# Altium PCB ESP-LED-Pcb.PcbDoc
Units mil, origin at the board's own origin, x right, y up, seen from the top; angles counter-clockwise.
Board outline 1655 x 850 mil, 2 copper layers (Top Layer, Bottom Layer); 27 components, 24 nets, 128 pads, 17 vias.
Unrouted connection lines stored in the file: 3.
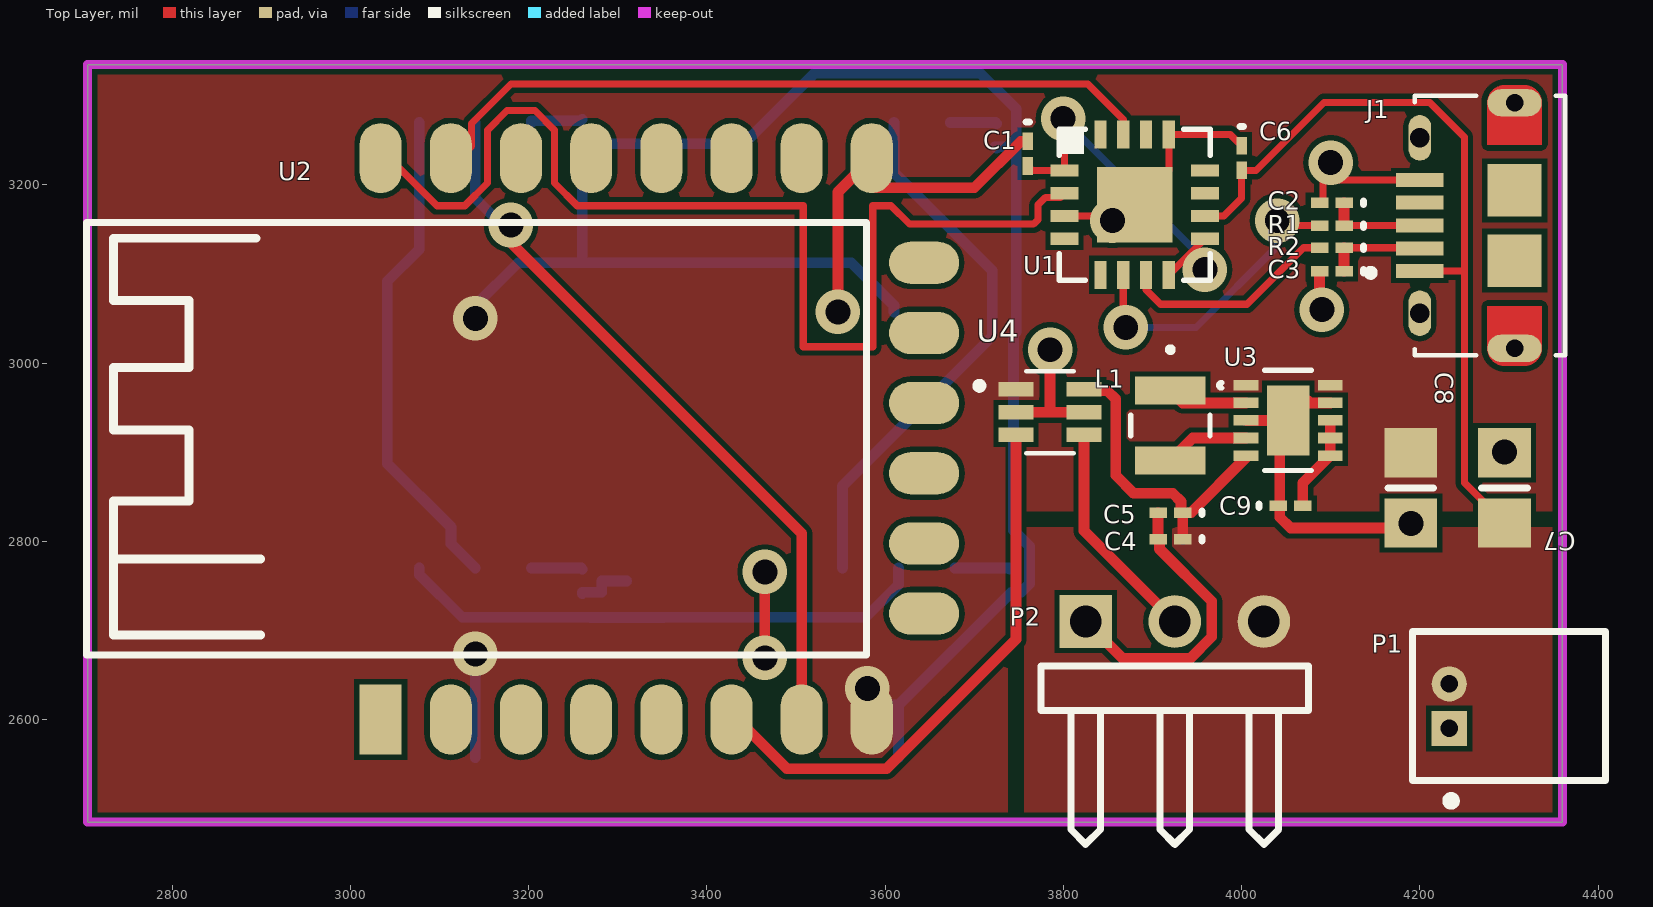
[diagram p0: Top Layer view]
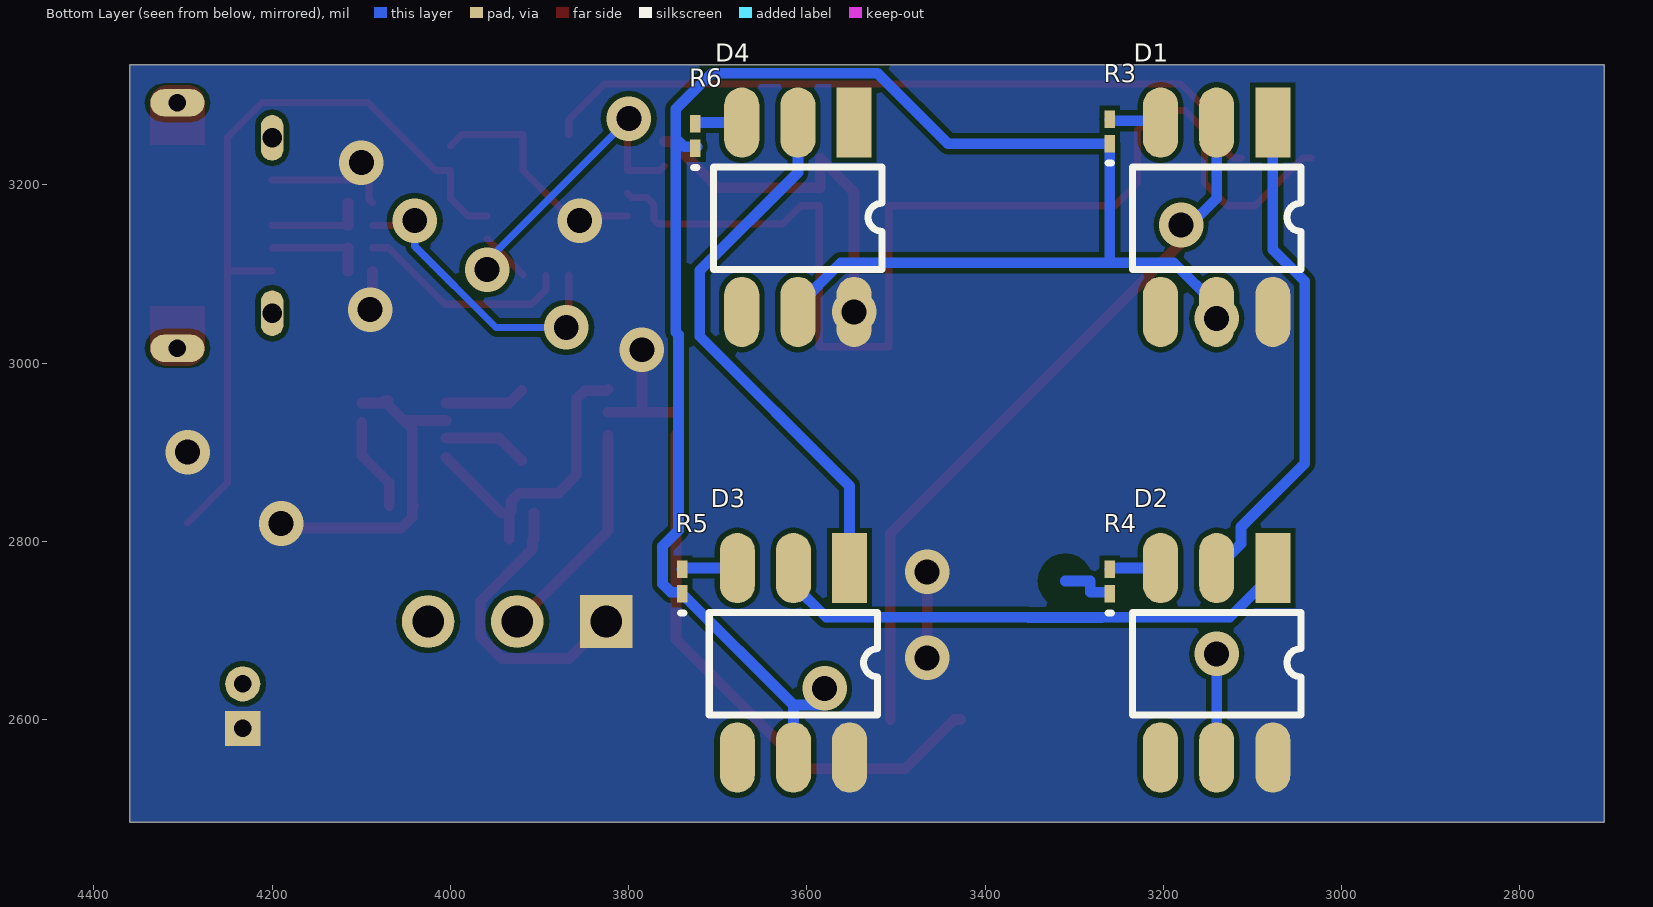
[diagram p1: Bottom Layer view, seen from below]

## Layer stack, top to bottom
Top Solder: solder mask 0.4, Solder Resist, Dk 3.5
Top Layer: signal copper 1.4
Dielectric 1: dielectric 12.6, FR-4, Dk 4.8
Bottom Layer: signal copper 1.4
Bottom Solder: solder mask 0.4, Solder Resist, Dk 3.5

## Board outline
2705,2485 2705,3335 4360,3335 4360,2485

## Design rules (kind name [scope] priority, off if disabled: settings)
Clearance [All] p1: gap=6 ignorepadtopadclearanceinfootprint=FALSE except(0: Arc-Hole Track-Hole SMDPad-Hole THPad-Hole Via-Hole Fill-Hole Poly-Hole Region-Hole Text-Hole)
PolygonConnect [All] p1: connectstyle=Direct reliefconductorwidth=10 reliefentries=4 polygonreliefangle="90 Angle" airgapwidth=10
RoutingVias [All] p1: holewidth=28 width=50 viastyle="Through Hole" minholewidth=28 minwidth=50 maxholewidth=28 maxwidth=50
SolderMaskExpansion [All] p1: expansion=4
Width [All] p1: maxlimit=30 minlimit=8 preferedwidth=12 minimp=50.000000 maximp=50.000000 favimp=50.000000
30 further rules are at their usual default settings.

## Components (designator, comment, footprint, x,y, rotation, side; value= is the part's Value field where it differs from the comment)
C1 "100nF" 0603 3760,3235 r270 top value=100pF
C2 "47nF" 0603 4101.22,3180 r180 top value=100pF
C3 "47nF" 0603 4101.22,3103.23 r180 top value=100pF
C4 "100nF" 0603 3920,2832.19 r180 top value=100pF
C5 "4.7uF" 0603 3920,2802.19 r180 top value=100pF
C6 "10uF" 0603 4000,3230 r270 top value=100pF
C7 "10uF" 6-0805_M 4295,2860 r270 top value=100pF
C8 "10uF" 6-0805_M 4190,2860 r90 top value=100pF
C9 "0.1uF" 0603 4055,2840 r0 top value=100pF
D1 "WS2812" WS2812 3077.01,3270 r270 bottom
D2 "WS2812" WS2812 3077.01,2770 r270 bottom
D3 "WS2812" WS2812 3552.01,2770 r270 bottom
D4 "WS2812" WS2812 3547.01,3270 r270 bottom
J1 "10118194-0001LF" *AMPHENOL_10118194-0001LF_10118194-0001LF(PRIMARY) 4306.3,3154.41 r90 top
L1 "1.5uH" DFE252012P-1R0M= 3920,2930 r270 top value=Value
P1 "Header 2" Molex_53048-0210_0 4300,2615 r90 top
P2 "Header 3H" HDR1X3H 3825,2710 r0 top
R1 "27R" 0603 4101.22,3154.41 r180 top value=1K
R2 "27R" 0603 4101.22,3129.41 r180 top value=1K
R3 "Res1" 0603 3260,3260 r90 bottom value=150
R4 "Res1" 0603 3260,2755 r90 bottom value=150
R5 "Res1" 0603 3740,2755 r90 bottom value=150
R6 "Res1" 0603 3725,3255 r90 bottom value=150
U1 "FT230XQ-R" *QFN16 3880,3177.81 r0 top
U2 "ESP12-F" ESP12-F 3033.78,2600.08 r90 top
U3 "Part Number: TPS63031DSKR" DSK10_2X1P2 4052.32,2935.63 r0 top value=Value
U4 "74LVC1T45GW,125" *SOT65P210X110-6N 3785,2945 r0 top

## Footprints (in the part's own frame and the unit in brackets; to place one, negate y for a bottom-side part, rotate by r counter-clockwise, add the part's x,y. Pads: shape width x height; smd on the part's side, far side on the other; paste and mask are expansions set on the pad)
6-0805_M [mm] "Chip Resistor, Body 2.0x1.2mm, IPC Low Density"
  rect 1.4x1.5 smd: 1(-1,0) 2(1,0)
  silkscreen extent 0,-0.65 0,0.65, body extent -1.07,-0.7 1.07,0.7, height 0.7
0603 [mm] "Chip Inductor, Body 0.6x0.3mm, IPC High Density"
  rect 0.5x0.3 smd: 1(-0.35,0) 2(0.35,0)
  silkscreen extent -0.9,-0.05 -0.9,0.05, body extent -0.33,-0.18 0.33,0.18, height 0.55
*AMPHENOL_10118194-0001LF_10118194-0001LF(PRIMARY) [mm]
  rect 0.4x1.35 smd: 1(-1.3,2.7) 2(-0.65,2.7) 3(0,2.7) 4(0.65,2.7) 5(1.3,2.7)
  oval 1.3x0.65 hole 0.55: S1(-2.5,2.7) S2(2.5,2.7)
  oval 0.775x1.55 hole 0.5: S3(-3.5,0) S6(3.5,0)
  rect 1.5x1.55 smd: S4(-1,0) S5(1,0)
  Top Layer region: -3.5,0.775 -3.5,0.575 -3.493,0.575 -3.48,0.574 -3.467,0.573 -3.454,0.571 -3.442,0.568 -3.429,0.565 -3.417,0.561 -3.404,0.556 -3.392,0.551 -3.381,0.545 -3.369,0.538 -3.358,0.531 -3.348,0.523 -3.338,0.515 -3.328,0.506 -3.319,0.497 -3.31,0.487 -3.302,0.477 -3.294,0.467 -3.287,0.456 -3.28,0.444 -3.274,0.433 -3.269,0.421 -3.264,0.408 -3.26,0.396 -3.257,0.383 -3.254,0.371 -3.252,0.358 -3.251,0.345 -3.25,0.332 -3.25,0.325 -3.25,-0.325 -3.25,-0.332 -3.251,-0.345 -3.252,-0.358 -3.254,-0.371 -3.257,-0.383 -3.26,-0.396 -3.264,-0.408 -3.269,-0.421 -3.274,-0.433 -3.28,-0.444 -3.287,-0.456 -3.294,-0.467 -3.302,-0.477 -3.31,-0.487 -3.319,-0.497 -3.328,-0.506 -3.338,-0.515 -3.348,-0.523 -3.358,-0.531 -3.369,-0.538 -3.381,-0.545 -3.392,-0.551 -3.404,-0.556 -3.417,-0.561 -3.429,-0.565 -3.442,-0.568 -3.454,-0.571 -3.467,-0.573 -3.48,-0.574 -3.493,-0.575 -3.5,-0.575 -3.5,-0.775 -2.3,-0.775 -2.3,0.775 -3.5,0.775
  Top Layer region: -3.5,0.775 -3.5,0.575 -3.507,0.575 -3.52,0.574 -3.533,0.573 -3.546,0.571 -3.558,0.568 -3.571,0.565 -3.583,0.561 -3.596,0.556 -3.608,0.551 -3.619,0.545 -3.631,0.538 -3.642,0.531 -3.652,0.523 -3.662,0.515 -3.672,0.506 -3.681,0.497 -3.69,0.487 -3.698,0.477 -3.706,0.467 -3.713,0.456 -3.72,0.444 -3.726,0.433 -3.731,0.421 -3.736,0.408 -3.74,0.396 -3.743,0.383 -3.746,0.371 -3.748,0.358 -3.749,0.345 -3.75,0.332 -3.75,0.325 -3.75,-0.325 -3.75,-0.332 -3.749,-0.345 -3.748,-0.358 -3.746,-0.371 -3.743,-0.383 -3.74,-0.396 -3.736,-0.408 -3.731,-0.421 -3.726,-0.433 -3.72,-0.444 -3.713,-0.456 -3.706,-0.467 -3.698,-0.477 -3.69,-0.487 -3.681,-0.497 -3.672,-0.506 -3.662,-0.515 -3.652,-0.523 -3.642,-0.531 -3.631,-0.538 -3.619,-0.545 -3.608,-0.551 -3.596,-0.556 -3.583,-0.561 -3.571,-0.565 -3.558,-0.568 -3.546,-0.571 -3.533,-0.573 -3.52,-0.574 -3.507,-0.575 -3.5,-0.575 -3.5,-0.775 -3.513,-0.775 -3.539,-0.774 -3.565,-0.771 -3.591,-0.767 -3.617,-0.761 -3.642,-0.755 -3.667,-0.746 -3.691,-0.737 -3.715,-0.726 -3.739,-0.715 -3.761,-0.701 -3.783,-0.687 -3.804,-0.672 -3.825,-0.655 -3.844,-0.638 -3.863,-0.619 -3.88,-0.6 -3.897,-0.579 -3.912,-0.558 -3.926,-0.536 -3.94,-0.514 -3.951,-0.49 -3.962,-0.466 -3.971,-0.442 -3.98,-0.417 -3.986,-0.392 -3.992,-0.366 -3.996,-0.34 -3.999,-0.314 -4,-0.288 -4,-0.275 -4,0.275 -4,0.288 -3.999,0.314 -3.996,0.34 -3.992,0.366 -3.986,0.392 -3.98,0.417 -3.971,0.442 -3.962,0.466 -3.951,0.49 -3.94,0.514 -3.926,0.536 -3.912,0.558 -3.897,0.579 -3.88,0.6 -3.863,0.619 -3.844,0.638 -3.825,0.655 -3.804,0.672 -3.783,0.687 -3.761,0.701 -3.739,0.715 -3.715,0.726 -3.691,0.737 -3.667,0.746 -3.642,0.755 -3.617,0.761 -3.591,0.767 -3.565,0.771 -3.539,0.774 -3.513,0.775 -3.5,0.775
  Top Layer region: 3.5,-0.775 3.5,-0.575 3.493,-0.575 3.48,-0.574 3.467,-0.573 3.454,-0.571 3.442,-0.568 3.429,-0.565 3.417,-0.561 3.404,-0.556 3.392,-0.551 3.381,-0.545 3.369,-0.538 3.358,-0.531 3.348,-0.523 3.338,-0.515 3.328,-0.506 3.319,-0.497 3.31,-0.487 3.302,-0.477 3.294,-0.467 3.287,-0.456 3.28,-0.444 3.274,-0.433 3.269,-0.421 3.264,-0.408 3.26,-0.396 3.257,-0.383 3.254,-0.371 3.252,-0.358 3.251,-0.345 3.25,-0.332 3.25,-0.325 3.25,0.325 3.25,0.332 3.251,0.345 3.252,0.358 3.254,0.371 3.257,0.383 3.26,0.396 3.264,0.408 3.269,0.421 3.274,0.433 3.28,0.444 3.287,0.456 3.294,0.467 3.302,0.477 3.31,0.487 3.319,0.497 3.328,0.506 3.338,0.515 3.348,0.523 3.358,0.531 3.369,0.538 3.381,0.545 3.392,0.551 3.404,0.556 3.417,0.561 3.429,0.565 3.442,0.568 3.454,0.571 3.467,0.573 3.48,0.574 3.493,0.575 3.5,0.575 3.5,0.775 2.3,0.775 2.3,-0.775 3.5,-0.775
  Top Layer region: 3.5,-0.775 3.5,-0.575 3.507,-0.575 3.52,-0.574 3.533,-0.573 3.546,-0.571 3.558,-0.568 3.571,-0.565 3.583,-0.561 3.596,-0.556 3.608,-0.551 3.619,-0.545 3.631,-0.538 3.642,-0.531 3.652,-0.523 3.662,-0.515 3.672,-0.506 3.681,-0.497 3.69,-0.487 3.698,-0.477 3.706,-0.467 3.713,-0.456 3.72,-0.444 3.726,-0.433 3.731,-0.421 3.736,-0.408 3.74,-0.396 3.743,-0.383 3.746,-0.371 3.748,-0.358 3.749,-0.345 3.75,-0.332 3.75,-0.325 3.75,0.325 3.75,0.332 3.749,0.345 3.748,0.358 3.746,0.371 3.743,0.383 3.74,0.396 3.736,0.408 3.731,0.421 3.726,0.433 3.72,0.444 3.713,0.456 3.706,0.467 3.698,0.477 3.69,0.487 3.681,0.497 3.672,0.506 3.662,0.515 3.652,0.523 3.642,0.531 3.631,0.538 3.619,0.545 3.608,0.551 3.596,0.556 3.583,0.561 3.571,0.565 3.558,0.568 3.546,0.571 3.533,0.573 3.52,0.574 3.507,0.575 3.5,0.575 3.5,0.775 3.513,0.775 3.539,0.774 3.565,0.771 3.591,0.767 3.617,0.761 3.642,0.755 3.667,0.746 3.691,0.737 3.715,0.726 3.739,0.715 3.761,0.701 3.783,0.687 3.804,0.672 3.825,0.655 3.844,0.638 3.863,0.619 3.88,0.6 3.897,0.579 3.912,0.558 3.926,0.536 3.94,0.514 3.951,0.49 3.962,0.466 3.971,0.442 3.98,0.417 3.986,0.392 3.992,0.366 3.996,0.34 3.999,0.314 4,0.288 4,0.275 4,-0.275 4,-0.288 3.999,-0.314 3.996,-0.34 3.992,-0.366 3.986,-0.392 3.98,-0.417 3.971,-0.442 3.962,-0.466 3.951,-0.49 3.94,-0.514 3.926,-0.536 3.912,-0.558 3.897,-0.579 3.88,-0.6 3.863,-0.619 3.844,-0.638 3.825,-0.655 3.804,-0.672 3.783,-0.687 3.761,-0.701 3.739,-0.715 3.715,-0.726 3.691,-0.737 3.667,-0.746 3.642,-0.755 3.617,-0.761 3.591,-0.767 3.565,-0.771 3.539,-0.774 3.513,-0.775 3.5,-0.775
  Top Layer lines w0: -3.5,0.77 -3.5,0.6 ; 3.5,-0.6 3.5,-0.77
  silkscreen extent -3.7,-1.45 3.7,4.2
*QFN16 [mm]
  rect 0.8x0.35 smd: 1(-2,0.975) 2(-2,0.325) 3(-2,-0.325) 4(-2,-0.975) 9(2,-0.975) 10(2,-0.325) 11(2,0.325) 12(2,0.975)
  rect 0.35x0.8 smd: 5(-0.975,-2) 6(-0.325,-2) 7(0.325,-2) 8(0.975,-2) 13(0.975,2) 14(0.325,2) 15(-0.325,2) 16(-0.975,2)
  rect 2.15x2.15 smd: 17(0,0)
  silkscreen extent -2.16,-2.15 2.15,2.15
*SOT65P210X110-6N [mm]
  rect 0.99x0.41 smd: 1(-0.97,0.65) 2(-0.97,0) 3(-0.97,-0.65) 4(0.97,-0.65) 5(0.97,0) 6(0.97,0.65)
  silkscreen extent -2.11,-1.17 0.68,1.17
DFE252012P-1R0M= [mm]
  rect 0.8x2.007 smd paste+0 mask+0: 1(-1,0) 2(1,0)
  silkscreen extent -2.24,-1.13 0.29,1.13, body extent 0,0 0.25,0.25, height 0.25
DSK10_2X1P2 [mm]
  rect 0.704x0.3 smd paste-0.15 mask+0: 1(-1.202,1) 2(-1.202,0.5) 3(-1.202,0) 4(-1.202,-0.5) 5(-1.202,-1) 6(1.202,-1) 7(1.202,-0.5) 8(1.202,0) 9(1.202,0.5) 10(1.202,1)
  rect 1.2x2 smd paste-0.987 mask-0.991: 11(0,0)
  Top Layer region: 0,1 0,1 0,1 0,1 0,1 0,1 0,1 0,1
  Top Layer region: 0,-1 0,-1 0,-1 0,-1 0,-1 0,-1 0,-1 0,-1
  silkscreen extent -1.98,-1.43 0.67,1.43, body extent 0,0 0.25,0.25, height 0.25
ESP12-F [mm]
  rect 2x1.2 smd: 1(0,0)
  oval 2x1.2 smd: 2(0,-2) 3(0,-4) 4(0,-6) 5(0,-8) 6(0,-10) 7(0,-12) 8(0,-14) 15(16,-14) 16(16,-12) 17(16,-10) 18(16,-8) 19(16,-6) 20(16,-4) 21(16,-2) 22(16,0)
  oval 1.2x2 smd: 9(3.018,-15.492) 10(5.018,-15.492) 11(7.018,-15.492) 12(9.018,-15.492) 13(11.018,-15.492) 14(13.018,-15.492)
  silkscreen extent 1.84,-13.84 14.17,8.38
HDR1X3H [mm] "Connector; Header; 3 Position; Right Angle"
  rect 1.5x1.5 hole 0.9: 1(0,0)
  round 1.5 hole 0.9: 2(2.54,0) 3(5.08,0)
  silkscreen extent -1.27,-6.35 6.35,-1.27
Molex_53048-0210_0 [mm]
  rect 1x1 hole 0.5 paste-1000 mask+0: 1(-0.635,1.7)
  round 1 hole 0.5 paste-1000 mask+0: 2(0.635,1.7)
  silkscreen extent -2.82,-2.75 2.12,2.75, body extent -2.32,-2.95 2.32,2.95, height 0.25
WS2812 [mm]
  rect 2x1 smd: 1(0,0)
  oval 2x1 smd: 2(0,-1.6) 3(0,-3.2) 4(5.4,-3.2) 5(5.4,-1.6) 6(5.4,0)
  silkscreen extent 1.27,-4 4.19,0.8, body extent 0,-4.06 5.46,0.89, height 2

## Part data
C1 C2 C3 C4 C5 C6 C7 C8 C9: library part Cap, "Capacitor", LatestRevisionDate=17-Jul-2002, LatestRevisionNote="Re-released for DXP Platform.", PackageDescription="Radial Cap, Thru-Hole; 2 Leads; 0.3 in Pin Spacing", PackageReference=RAD-0.3, Published=8-Jun-2000, Publisher="Altium Limited"
J1: "Micro Usb, 2.0 Type b, Rcpt, Smt", Package=None, Availability=Unavailable, MF="Amphenol ICC", MP=10118194-0001LF, Price=None, SnapEDA_Link=https://www.snapeda.com/parts/10118194-0001LF/Amphenol%20ICC/view-part/?ref=snap
L1: library part DFE252012P-1R5M=, "No Description Available", Manufacturer_Part_Number=DFE252012P-1R5M=P2, Built_By=EMA_UL_Team, Copyright="Copyright (C) 2018 Accelerated Designs. All rights reserved", RefDes=RefDes, Type=DEV, Vendor=Murata
P1: "Header, 2-Pin", LatestRevisionDate=17-Jul-2002, LatestRevisionNote="Re-released for DXP Platform.", Publisher="Altium Limited"
P2: "Header, 3-Pin, Right Angle", LatestRevisionDate=17-Jul-2002, LatestRevisionNote="Re-released for DXP Platform.", Publisher="Altium Limited"
R1 R2: library part Res1, "Resistor", LatestRevisionDate=17-Jul-2002, LatestRevisionNote="Re-released for DXP Platform.", PackageDescription="Axial Device, Thru-Hole; 2 Leads; 0.3 in Pin Spacing", PackageReference=AXIAL-0.3, Published=8-Jun-2000, Publisher="Altium Limited"
R3 R4 R5 R6: "Resistor", LatestRevisionDate=17-Jul-2002, LatestRevisionNote="Re-released for DXP Platform.", PackageDescription="Axial Device, Thru-Hole; 2 Leads; 0.3 in Pin Spacing", PackageReference=AXIAL-0.3, Published=8-Jun-2000, Publisher="Altium Limited"
U1: "FT230X Series 3 Mbaud USB Full Speed to Basic UART IC with USB Charger Detection", Package="QFN-16 FTDI", Digi-Key_Part_Number=768-1130-1-ND, Digi-Key_Purchase_URL=https://www.digikey.com/product-detail/en/ftdi-future-technology-devices-international-ltd/FT230XQ-R/768-1130-1-ND/3029158?utm_source=snapeda&utm_medium=aggregator&utm_campaign=symbol, MF=FTDI,, MP=FT230XQ-R, SnapEDA_Link=https://www.snapeda.com/parts/FT230XQ-R/FTDI%2C%20Future%20Technology%20Devices%20International%20Ltd/view-part/?ref=snap
U3: library part TPS63031DSKR, "No Description Available", Manufacturer="Texas Instruments", Built_By=EMA_UL_Team, Copyright="Copyright (C) 2018 Accelerated Designs. All rights reserved", Manufacturer_Part_Number=TPS63031DSKR, RefDes=RefDes, Type=DEV, Vendor="Texas Instruments"
U4: "74LVC_H_1T45 - Dual supply translating transceiver; 3-state", Package="SOT-363 Nexperia USA", Availability=Unavailable, MF="Nexperia USA", MP=74LVC1T45GW,125, Price=None, SnapEDA_Link=https://www.snapeda.com/parts/74LVC1T45GW%2C125/Nexperia%20USA%20Inc./view-part/?ref=snap

## Via types
v1: diameter 50, hole 28, Top Layer to Bottom Layer, 17 vias

## Nets (pads, with @x,y where several pads share a name; then routed paths per layer and width w, separated by ;. In a path a pad name is that pad's centre, name@x,y a point inside that pad or via, vN(x,y) a via of type N, cw(c..) or ccw(c..) an arc to the next point about the centre after c; other vN are vias at no path point)
3V3: C8.2 D1.5 D2.5 D3.5 D4.5 U2.8 U3.1 U3.10 U4.1 | length 2205.1
  Bottom Layer w12: D2.5 v1(3140,2673.63) ; v1(3140,3050.24) D1.5 3140,3064.56 3188.21,3112.77 3260,3112.77 ; v1(3580,2635) 3580,2616.22 3615,2616.22 ; D4.5 3610,3064.56 3561.79,3112.77 3260,3112.77 ; D3.5 3615,2616.22 ; 3725,3241.22 3723.28,3242.94 3737.53,3242.94 3747,3252.4 ; 3260,3112.77 3260,3246.22 3441.55,3246.22 3520.7,3325.37 3670,3325.37 3706.79,3325.37 3747,3285.16 3747,3252.4 ; 3615,2616.22 3740,2741.22 3741.72,2742.94 3752.53,2742.94 3762,2752.4 3762,2794.53 3744,2812.53 3744,3031.98 3747,3034.98 3747,3252.4
5V: R3.1 R4.1 R5.1 R6.1 | length 64.3
  Bottom Layer w12: R4.1 3260,2742.94 3281.91,2742.94 3281.91,2755.53 3310,2755.53
GND: C1.1 C2.2 C3.2 C4.2 C5.2 C6.1 C7.1 C8.1 C9.1 D1.6 D2.6 D3.6 D4.6 J1.5 P1.1 P2.1 U1.3 U1.13 U1.17 U2.15 U3.3 U3.9 U3.11 U4.2 U4.5 | length 1833.5
  Top Layer w8: 3700,3196.63 3700,3196.77 ; U1.3 3867.2,3165.01 U1.17 3918.39,3216.19 U1.13 3987.23,3256.55 C6.1 ; C2.2 4091.16,3183.72 4091.16,3206.16 4100,3215 v1(4100,3225) ; v1@4100,3205.59 J1.5
  Top Layer w12: v1(3465,2669.28) v1(3465,2765.6) ; v1(3547.01,3057.4) 3547.01,3192.05 U2.15 3584.96,3196.63 3700,3196.63 ; 3700,3196.77 3752.01,3248.78 C1.1 ; U4.2 3785,2945 ; v1(3785,3015) 3785,2945 ; U4.5 3785,2945 ; P2.1 3866.53,2668.47 3942.2,2668.47 3966.53,2692.8 3966.53,2732.86 3907.94,2791.45 3907.94,2800.47 C5.2 C4.2@3906.22,2832.1 ; U3.3 U3.11 ; U3.11@4069.78,2957.78 4074.47,2957.78 U3.11@4072.01,2955.31 ; C3.2 4087.44,3062.56 v1(4090,3060) ; U3.9 U3.11@4072.01,2955.31 ; C8.1 4184.37,2815 4055,2815 4042.94,2827.06 4042.94,2838.28 C9.1 4042.94,2841.72 4042.94,2926.25 U3.11 ; U3.11 U3.11@4072.01,2955.31
  other v1: 4190,2820 4295,2900 3855,3160
LED1: D1.2 U2.7 | length 841.6
  Top Layer w12: v1(3180,3155) 3180,3135 3506.22,2808.78 U2.7
  Bottom Layer w12: D1.2 3140,3185 3180,3145 v1(3180,3155)
LED2: P2.2 U4.4 | length 251.6
  Top Layer w12: U4.4 3823.19,2811.81 P2.2
NetC1_2: C1.2 U1.1 U1.8 U1.9 | length 394.3
  Top Layer w8: C1.2 3765.03,3216.19 U1.1 3801.26,3272.77 v1(3799.72,3274.3) ; U1.8 U1.9
  Bottom Layer w8: v1(3799.72,3274.3) 3958.74,3115.28 v1(3958.74,3105)
NetC2_1: C2.1 J1.3 R1.1 | length 110.6
  Top Layer w8: R1.1 J1.3
  Top Layer w12: R1.1 C2.1
NetC3_1: C3.1 J1.2 R2.1 | length 111.4
  Top Layer w8: R2.1 4199.41,3129.41 J1.2
  Top Layer w12: C3.1 R2.1
NetC9_2: C9.2 U3.6 U3.7 U3.8 | length 106.2
  Top Layer w12: C9.2 4068.78,2865.4 U3.6 U3.7 U3.8@4099.64,2933.41
NetD1_1: D1.1 D2.2 | length 555.7
  Bottom Layer w12: D1.1 3077.01,3127.55 3041.32,3091.87 3041.32,2887.37 3112.69,2816 3112.69,2797.31 D2.2
NetD1_3: D1.3 R3.2 | length 59.8
  Bottom Layer w12: D1.3 3202.99,3272.06 3258.28,3272.06 R3.2
NetD2_1: D2.1 D3.2 | length 599.2
  Bottom Layer w12: D2.1 3077.01,2762.84 3125.22,2714.63 3154.78,2714.63 3163.35,2714.63 3269,2714.63 3269,2714.53 3351,2714.53 3351,2714.63 3578.32,2714.63 3615,2751.31 D3.2
NetD2_3: D2.3 R4.2 | length 57.5
  Bottom Layer w12: D2.3 3258.78,2770 R4.2
NetD3_1: D3.1 D4.2 | length 615.1
  Bottom Layer w12: D3.1 3552.01,2862.01 3720,3030 3720,3103.99 3610,3213.99 D4.2
NetD3_3: D3.3 R5.2 | length 62.5
  Bottom Layer w12: D3.3 3738.78,2770 R5.2
NetD4_3: D4.3 R6.2 | length 52.5
  Bottom Layer w12: D4.3 3723.78,3270 R6.2
NetL1_1: L1.1 U3.2 | length 90.8
  Top Layer w12: L1.1 3934.06,2955.31 U3.2
NetL1_2: L1.2 U3.4 | length 95.5
  Top Layer w12: L1.2 3945.32,2915.94 U3.4
NetR1_2: R1.2 U1.6 | length 346.6
  Top Layer w8: U1.6 3867.2,3042.8 v1(3870,3040) ; v1(4040,3160) 4045.59,3154.41 R1.2
  Bottom Layer w8: v1(3870,3040) 3948.89,3040 4040,3131.11 v1(4040,3160)
NetR2_2: R2.2 U1.7 | length 244.5
  Top Layer w8: U1.7 3892.8,3082.22 3909.02,3066 4006,3066 4069.41,3129.41 R2.2
NetU1_2: U1.2 U2.22 | length 1296.5
  Top Layer w8: U2.22 3043.57,3230 3096.94,3176.63 3128.1,3176.63 3153.64,3202.16 3153.64,3261.33 3175.68,3283.37 3206.84,3283.37 3228.88,3261.33 3228.88,3202.16 3254.42,3176.63 3508.01,3176.63 3508.01,3018.4 3586.01,3018.4 3586.01,3176.63 3606.63,3176.63 3627.26,3156 3766.66,3156 3771.51,3160.86 3771.51,3177.7 3779.71,3185.9 3796.56,3185.9 U1.2
NetU1_15: U1.15 U2.21 | length 837.5
  Top Layer w8: U2.21 3122.31,3230 3135.64,3243.33 3135.64,3268.79 3180.15,3313.3 3827.3,3313.3 3867.2,3273.4 U1.15
NetU2_6: U2.6 U4.3 | length 631.8
  Top Layer w12: U2.6 3434.44,2600.08 3489.81,2544.71 3601.37,2544.71 3746.81,2690.15 U4.3
VIN: C4.1 C5.1 C6.2 C7.2 J1.1 P1.2 P2.3 U1.10 U3.5 U4.6 | length 1231.9
  Top Layer w8: U1.10 3980,3165.01 4000,3185.01 C6.2 4016.22,3216.22 4092.43,3292.43 4211.1,3292.43 4250,3253.52 4250,3105 ; J1.1 4248.23,3103.23 4250,3105 ; C7.2 4250,2865.63 4250,3105
  Top Layer w12: U4.6 3824.71,2969.07 3849.3,2969.07 3858.68,2959.7 3858.68,2874.08 3878.66,2854.1 3922.69,2854.1 3932.06,2844.72 3932.06,2833.91 C4.1 ; C5.1 C4.1 ; U3.5@4005,2894.04 3943.15,2832.19 C4.1
pads on no net: D1.4 D2.4 D3.4 D4.1 D4.4 J1.4 J1.S1 J1.S2 J1.S3 J1.S4 J1.S5 J1.S6 U1.4 U1.5 U1.11 U1.12 U1.14 U1.16 U2.1 U2.2 U2.3 U2.4 U2.5 U2.9 U2.10 U2.11 U2.12 U2.13 U2.14 U2.16 U2.17 U2.18 U2.19 U2.20

## Polygon pours and split planes (outlines as drawn)
3V3 on Top Layer (solid, pour order 2): 2705,2485 3737.81,2485 3737.81,2825 3746.81,2834 4360,2834 4360,3335 2705,3335
VIN on Top Layer (solid, pour order 2): 3755.81,2485 3755.81,2816 4360,2816 4360,2485
GND on Bottom Layer (solid, pour order 0): 2705,3335 2705,2485 4360,2485 4360,3335

## Keep-outs
Top Layer:
  the board outline again, w10

## Other copper
Top Layer:
  pour cut-out: 3746.81,2825